# Altium PCB PCB1.PcbDoc
Units mil, origin at the board's own origin, x right, y up, seen from the top; angles counter-clockwise.
Board outline 4640.02 x 1550.03 mil, 2 copper layers (Top Layer, Bottom Layer), stack 65.792 mil thick; 58 components, 43 nets, 194 pads, 4 vias.
Unrouted connection lines stored in the file: 1.
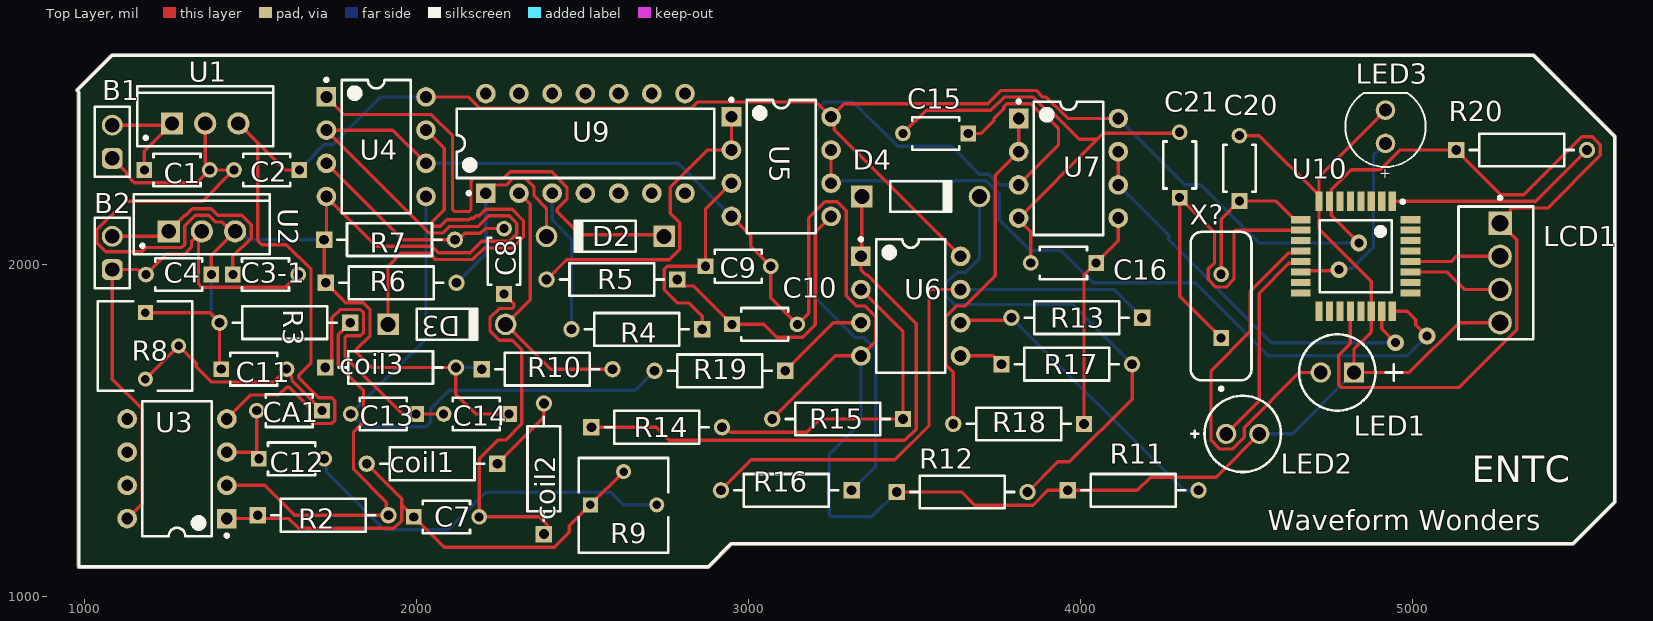
[diagram p0: Top Layer view]
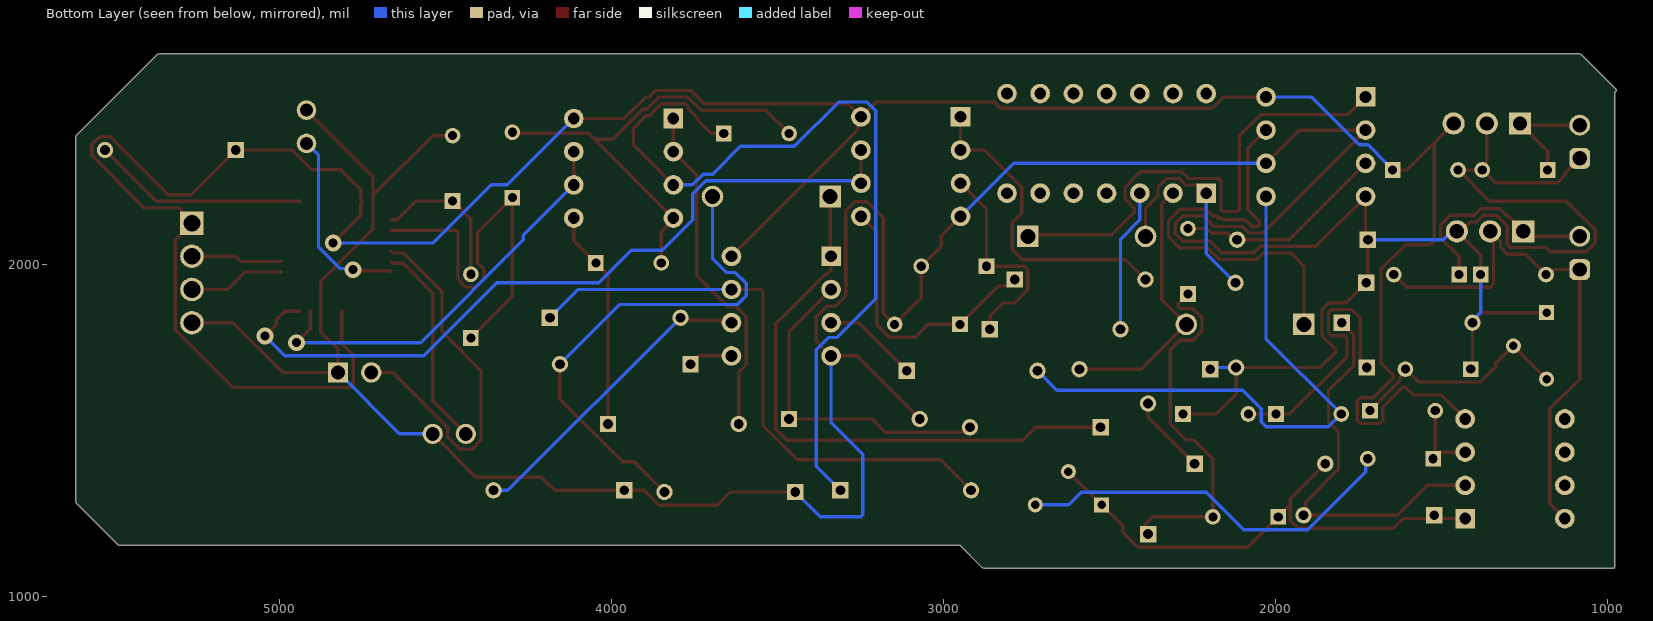
[diagram p1: Bottom Layer view, seen from below]
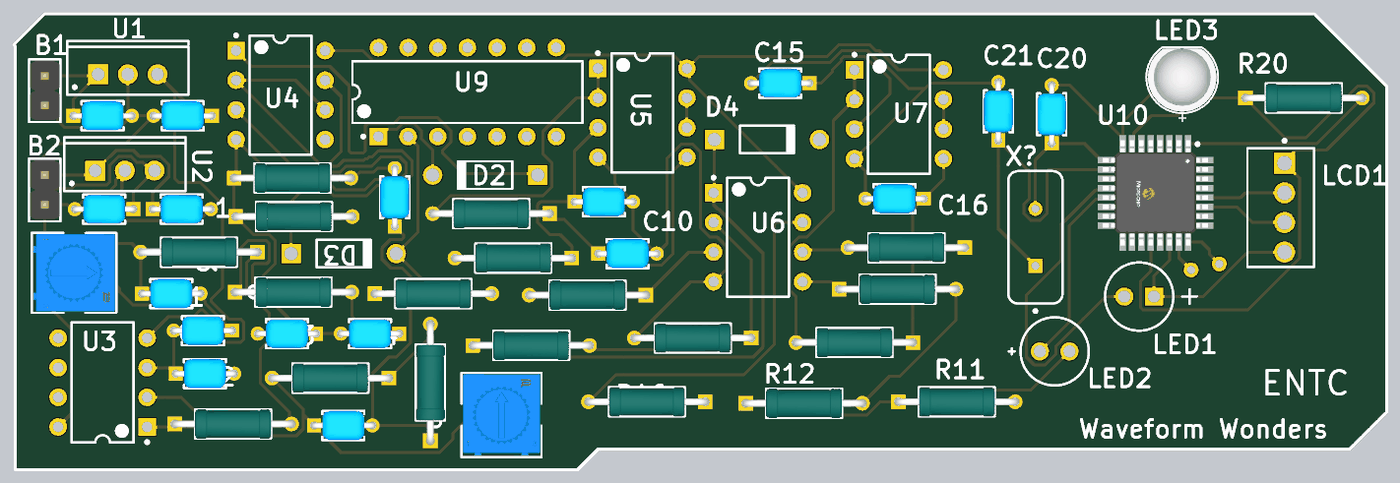
[diagram p2: 3D render of the assembled board from above, using the file's embedded part models]

## Layer stack, top to bottom
Top Solder: solder mask 0.4, Solder Resist, Dk 3.5
Top Layer: signal copper 1.4
Dielectric 1: dielectric 62.9921, FR-4, Dk 4.8
Bottom Layer: signal copper 1.4
Bottom Solder: solder mask 0.4, Solder Resist, Dk 3.5

## Board outline
985,1084.98 cw(c985,1090) 979.99,1090 979.99,2519.99 cw(c980,2525) 976.45,2528.55 1081.45,2633.55 1085,2635.01 5365,2635.01 5368.55,2633.55 5613.55,2388.55 5615.02,2385 5615.02,1285 5613.55,1281.45 5488.55,1156.45 5485,1154.98 2952.08,1154.98 2883.55,1086.45 2880,1084.98

## Design rules (kind name [scope] priority, off if disabled: settings)
Clearance Clearance_1 [OnMid vs OnMid] p1: gap=10 ignorepadtopadclearanceinfootprint=FALSE except(0: Arc-Hole Track-Hole SMDPad-Hole THPad-Hole Via-Hole Fill-Hole Poly-Hole Region-Hole Text-Hole) sourcerule=38 cellrowname=All cellrowtype=0 cellcolname=All cellcoltype=0 innerlayers=TRUE
Clearance Clearance_2 [(ExistsOnLayer('Top Layer') Or ExistsOnLayer('Bottom Layer')) vs (ExistsOnLayer('Top Layer') Or ExistsOnLayer('Bottom Layer'))] p2: gap=10 ignorepadtopadclearanceinfootprint=FALSE except(0: Arc-Hole Track-Hole SMDPad-Hole THPad-Hole Via-Hole Fill-Hole Poly-Hole Region-Hole Text-Hole) sourcerule=38 cellrowname=All cellrowtype=0 cellcolname=All cellcoltype=0 outerlayers=TRUE
Clearance [All] p3: gap=10 ignorepadtopadclearanceinfootprint=FALSE except(0: Arc-Hole Track-Hole SMDPad-Hole THPad-Hole Via-Hole Fill-Hole Poly-Hole Region-Hole Text-Hole)
Clearance [All] p4: gap=10 ignorepadtopadclearanceinfootprint=FALSE except(0: Arc-Hole Track-Hole SMDPad-Hole THPad-Hole Via-Hole Fill-Hole Poly-Hole Region-Hole Text-Hole)
PolygonConnect [All] p1: connectstyle=Relief reliefconductorwidth=10 reliefentries=4 polygonreliefangle="90 Angle" airgapwidth=10
RoutingVias [All] p1: holewidth=28 width=50 viastyle="Through Hole" minholewidth=28 minwidth=50 maxholewidth=28 maxwidth=50
ShortCircuit ShortCircuit_2 [All] p1: allowed=FALSE
ShortCircuit ShortCircuit_1 [All] p2: allowed=FALSE
ShortCircuit [All] p3: allowed=FALSE
SolderMaskExpansion [All] p1: expansion=4 istentingtop=FALSE
Width [All] p1: maxlimit=10 minlimit=10 preferedwidth=10
29 further rules are at their usual default settings.

## Components (designator, comment, footprint, x,y, rotation, side; value= is the part's Value field where it differs from the comment)
B1 "7v" 61300211121 1085,2370 r90 top
B2 "7v" 61300211121 1085,2035 r90 top
C1 "0.33u" FP-RCE0K1-MFG 1280,2285 r0 top
C2 "0.1u" FP-RCE0K1-MFG 1550,2285 r180 top
C3-1 "0.33u" FP-RCE0K1-MFG 1546.57,1970 r0 top
C4 "0.1u" FP-RCE0K1-MFG 1285,1970 r180 top
C7 "0.1u" FP-RCE0K1-MFG 2091.57,1240 r0 top
C8 "22p" FP-RCE0K1-MFG 2265,2010 r90 top
C9 "1u" FP-RCE0K1-MFG 2970,1995 r0 top
C10 "1u" FP-RCE0K1-MFG 3050,1820 r0 top
C11 "0.1u" FP-RCE0K1-MFG 1511.57,1685 r0 top
C12 "0.1u" FP-RCE0K1-MFG 1625,1415 r0 top
C13 "0.1u" FP-RCE0K1-MFG 1901.57,1550 r180 top
C14 "0.1u" FP-RCE0K1-MFG 2181.57,1550 r180 top
C15 "1u" FP-RCE0K1-MFG 3565,2395 r180 top
C16 "1u" FP-RCE0K1-MFG 3950,2005 r180 top
C20 "22p" FP-RCE0K1-MFG 4480,2290 r90 top
C21 "22p" FP-RCE0K1-MFG 4300,2300 r90 top
CA1 "0.1u" FP-RCE0K1-MFG 1618.43,1560 r180 top
coil1 "1k" FP-MRS25-MFG 2048.15,1400 r180 top
coil2 "1k" FP-MRS25-MFG 2385,1385 r90 top
coil3 "1k" FP-MRS25-MFG 1923.15,1690 r0 top
D2 "1N4001" DIOD-DO-41-P-2_V 2570,2085 r180 top
D3 "1N4001" DIOD-DO-41-P-2_V 2092.83,1820 r0 top
D4 "1N4001" DIOD-DO-41-P-2_V 3520,2205 r0 top
LCD1 "640456-4" TECO-640456-4 5265,1975 r90 top
LED1 "Red" AVAG-HLMP-3301-2 4825,1675 r180 top
LED2 "Green" AVAG-HLMP-4740 4490,1490 r0 top
LED3 "151051BS04000" WL-TMRC_D5.9H8.7 4920.01,2414.99 r90 top
R2 "18k" FP-MRS25-MFG 1720,1245 r0 top
R3 "18k" FP-MRS25-MFG 1605,1825 r180 top
R4 "18k" FP-MRS25-MFG 2665,1805 r180 top
R5 "18k" FP-MRS25-MFG 2590,1955 r180 top
R6 "1k" FP-MRS25-MFG 1925,1945 r0 top
R7 "1k" FP-MRS25-MFG 1920,2075 r0 top
R8 "3362P-1-104TLF" FP-3362P-T-MFG 1183.62,1755 r270 top
R9 "3362P-1-104TLF" FP-3362P-T-MFG 2625,1275 r0 top
R10 "1k" FP-MRS25-MFG 2395,1685 r0 top
R11 "1k" FP-MRS25-MFG 4160,1320 r0 top
R12 "2k" FP-MRS25-MFG 3645,1315 r0 top
R13 "1k" FP-MRS25-MFG 3990,1840 r180 top
R14 "2k" FP-MRS25-MFG 2725,1510 r0 top
R15 "2k" FP-MRS25-MFG 3270,1535 r180 top
R16 "2k" FP-MRS25-MFG 3115,1320 r180 top
R17 "1k" FP-MRS25-MFG 3960,1700 r0 top
R18 "2k" FP-MRS25-MFG 3815,1520 r180 top
R19 "1k" FP-MRS25-MFG 2915,1680 r180 top
R20 "10k" FP-MRS25-MFG 5330,2345 r0 top
U1 "7805" TO220 1365,2425 r0 top
U2 "7805" TO220 1355,2100 r0 top
U3 "LM358N" N08E 1280,1385 r180 top
U4 "LM358N" P0008A 1880,2355 r0 top
U5 "LM358N" P0008A 3100,2295 r0 top
U6 "LM358N" P0008A 3490,1875 r0 top
U7 "LM358N" P0008A 3965,2290 r0 top
U9 "XOR" N0014A 2510,2365 r90 top
U10 "ATMEGA328P-AUR" FP-32A-MFG 4830,2025 r270 top
X? "FOXSLF/160-20" FOX-FOXSLF160-20 4425,1875 r90 top

## Footprints (in the part's own frame and the unit in brackets; to place one, negate y for a bottom-side part, rotate by r counter-clockwise, add the part's x,y. Pads: shape width x height; smd on the part's side, far side on the other; paste and mask are expansions set on the pad)
61300211121 [mm] "Pin Header, pitch 2.54 mm, THT, Vertical, single row, 2p"
  rrect50% 1.6x1.6 hole 1.1: 1(-1.27,0)
  round 1.6 hole 1.1: 2(1.27,0)
  silkscreen extent -2.69,-1.34 2.69,1.34, body extent -2.54,-1.27 2.54,1.27, height 8.57
AVAG-HLMP-3301-2 [mm] "THD, 2-Leads, Body Dia 5.85mm"
  rect 1.55x1.55 hole 1.05: 1(0,0)
  round 1.55 hole 1.05: 2(2.54,0)
  silkscreen extent -3.68,-2.92 4.19,2.92
AVAG-HLMP-4740 [mm] "THD, 2-Leads, Dia 5.845mm, Pitch 2.54mm"
  round 1.55 hole 1.05: 1(-1.27,0) 2(1.27,0)
  silkscreen extent -3.92,-2.92 2.92,2.92
DIOD-DO-41-P-2_V [mm] "2-Leads, Axial Lead, Body 4.635x2.36mm, Pin Spacing 9mm"
  rect 1.65x1.65 hole 1.15: 1(-4.5,0)
  round 1.65 hole 1.15: 2(4.5,0)
  silkscreen extent -2.32,-1.18 2.32,1.18, body extent -4.93,-1.18 4.93,1.18, height 2.35
FOX-FOXSLF160-20 [mm] "THD, 2-Leads, Body 11.35x4.65mm"
  rect 1.2x1.2 hole 0.7: 1(-2.44,0)
  round 1.2 hole 0.7: 2(2.44,0)
  silkscreen extent -6.45,-2.33 5.68,2.33, body extent -5.67,-2.32 5.68,2.33, height 3.6
FP-32A-MFG [mm]
  rect 1.5x0.55 smd paste+0 mask+0: 1(-4.2,2.8) 2(-4.2,2) 3(-4.2,1.2) 4(-4.2,0.4) 5(-4.2,-0.4) 6(-4.2,-1.2) 7(-4.2,-2) 8(-4.2,-2.8) 17(4.2,-2.8) 18(4.2,-2) 19(4.2,-1.2) 20(4.2,-0.4) 21(4.2,0.4) 22(4.2,1.2) 23(4.2,2) 24(4.2,2.8)
  rect 0.55x1.5 smd paste+0 mask+0: 9(-2.8,-4.2) 10(-2,-4.2) 11(-1.2,-4.2) 12(-0.4,-4.2) 13(0.4,-4.2) 14(1.2,-4.2) 15(2,-4.2) 16(2.8,-4.2) 25(2.8,4.2) 26(2,4.2) 27(1.2,4.2) 28(0.4,4.2) 29(-0.4,4.2) 30(-1.2,4.2) 31(-2,4.2) 32(-2.8,4.2)
  silkscreen extent -4.3,-2.75 2.75,3.73, body extent -5.05,-5.05 5.05,5.05, height 0.25
FP-3362P-T-MFG [mm]
  rect 1.15x1.15 hole 0.65 paste-2539.97 mask+0: 1(-2.54,0.035)
  round 1.15 hole 0.65 paste-2539.97 mask+0: 2(0,2.575) 3(2.54,0.035)
  silkscreen extent -3.42,-3.62 3.42,3.62, body extent -3.52,-3.72 3.52,3.72, height 0.25
FP-MRS25-MFG [mm]
  rect 1.25x1.25 hole 0.75 paste-2539.97 mask+0: 1(-5,0)
  round 1.25 hole 0.75 paste-2539.97 mask+0: 2(5,0)
  silkscreen extent -3.98,-1.25 3.98,1.25, body extent -5.72,-1.35 5.72,1.35, height 0.25
FP-RCE0K1-MFG [mm]
  rect 1.2x1.2 hole 0.7 paste-2539.97 mask+0: 1(-2.5,0)
  round 1.2 hole 0.7 paste-2539.97 mask+0: 2(2.5,0)
  silkscreen extent -1.8,-1.25 1.8,1.25, body extent -3.2,-1.35 3.2,1.35, height 0.25
N08E [mm] "DIP, 8-Pin, Row Spacing 7.62 mm, Pitch 2.54 mm"
  rect 1.5x1.5 hole 0.9: 1(-3.81,3.81)
  round 1.5 hole 0.9: 2(-3.81,1.27) 3(-3.81,-1.27) 4(-3.81,-3.81) 5(3.81,-3.81) 6(3.81,-1.27) 7(3.81,1.27) 8(3.81,3.81)
  silkscreen extent -3.94,-5.15 2.65,5.23, body extent -3.6,-5.15 3.6,5.15, height 5.33
N0014A [mm] "DIP, 14-Leads, Body 19.7x6.6mm, Pitch 2.54mm"
  rect 1.5x1.5 hole 0.9: 1(-3.81,7.62)
  round 1.5 hole 0.9: 2(-3.81,5.08) 3(-3.81,2.54) 4(-3.81,0) 5(-3.81,-2.54) 6(-3.81,-5.08) 7(-3.81,-7.62) 8(3.81,-7.62) 9(3.81,-5.08) 10(3.81,-2.54) 11(3.81,0) 12(3.81,2.54) 13(3.81,5.08) 14(3.81,7.62)
  silkscreen extent -3.93,-9.85 2.65,9.85, body extent -3.95,-9.85 3.95,9.85, height 5.08
P0008A [mm] "DIP, 8-Leads, Body 10.15x6.6mm, Pitch 2.54mm"
  rect 1.5x1.5 hole 0.9: 1(-3.81,3.81)
  round 1.5 hole 0.9: 2(-3.81,1.27) 3(-3.81,-1.27) 4(-3.81,-3.81) 5(3.81,-3.81) 6(3.81,-1.27) 7(3.81,1.27) 8(3.81,3.81)
  silkscreen extent -3.93,-5.1 2.65,5.23, body extent -3.95,-5.07 3.95,5.07, height 5.08
TECO-640456-4 [mm] "Through Hole, 4-Leads, Body 10.16x5.72mm, Pitch 2.54mm"
  rect 1.8x1.8 hole 1.27 paste-2539.97: 1(3.81,0)
  round 1.8 hole 1.27 paste-2539.97: 2(1.27,0) 3(-1.27,0) 4(-3.81,0)
  silkscreen extent -5.08,-2.54 5.86,3.18, body extent -5.08,-2.54 5.08,3.18, height 10.03
TO220 [mm] "TO, Thru-Hole, Vertical, Heatsink Mounted; 3 In-Line Leads; Pitch 2.54 mm"
  rect 1.7x1.7 hole 1.1: 1(-2.54,0)
  round 1.7 hole 1.1: 2(0,0) 3(2.54,0)
  silkscreen extent -5.2,-1.75 5.2,2.85, body extent -5.25,-1.8 5.25,2.9, height 19.7
WL-TMRC_D5.9H8.7 [mm] "THT Mono-color Round Color LED, 2-leads"
  round 1.5 hole 1: 1(-1.27,0) 2(1.27,0)
  silkscreen extent -3.07,-3.07 2.58,3.08, body extent -2.95,-2.95 2.45,2.95, height 9.2

## Part data
B1 B2: library part CMP-1712-00002-5, Color=Black, Contact Resistance=20mΩ, Current Rating=3A, Max Operating Temperature=125°C, Min Operating Temperature=-40°C, Operating Supply Voltage=250V, Connector Type="Male Pin", Contact Gender=Male, Contact Material=Copper, Contact Mating Length=5.9944mm, Contact Plating=Gold, Gender=Male, Height=8.94mm, Housing Material=PBT, Lead Free="Lead Free", Lead Pitch=2.54mm, Mount="Through Hole", NexarPartId=20081794, Number of Contacts=2, Number of Pins=2, Number of Positions=2, Number of Rows=1, Orientation=Vertical, Packaging=Bulk, Pitch=2.54mm, REACH SVHC="No SVHC", RoHS=Compliant, Termination="Through Hole", Voltage Rating=250V
C1 C2 C3-1 C4 C7 C8 C9 C10 C11 C12 C13 C14 C15 C16 C20 C21 CA1: library part CMP-06035-031280-1, "Cap Ceramic 100nF 50V X7R ±10% Radial 5mm +125°C Automotive Bulk", Capacitance=100nF, Case/Package=Radial, Dielectric=X7R, Max Operating Temperature=125°C, Min Operating Temperature=-55°C, Package Quantity=2000, Ratings=AEC-Q200, Resistor Type=Ceramic, Tolerance=10%, Voltage Rating=50V, Height=3.5mm, Height - Seated (Max)=0.138inch, Lead Diameter=0.5mm, Lead Free="Lead Free", Lead Pitch=0.197inch, Lead/Base Style="Formed Leads", Length=0.142inch, Mount="Through Hole", Packaging="Tape and Reel", Termination=Radial, Voltage Rating (DC)=50V, Width=0.098inch
coil1 coil2 coil3 R2 R3 R4 R5 R6 R7 R10 R11 R12 R13 R14 R15 R16 R17 R18 R19 R20: library part CMP-00030-42757237-1, "MRS25000C1000FRP00 Resistor, 100 Ohm, ± 1%, 600 mW, Axial Leaded, Metal Film (Thin Film), Professional", Case/Package=Axial, Max Operating Temperature=155°C, Max Power Dissipation=600mW, Min Operating Temperature=-55°C, Resistance=100Ω, Temperature Coefficient=50ppm/°C, Tolerance=1%, Voltage Rating=350V, Composition="Metal Film, Thin Film", Contact Plating=Tin, Diameter=2.5mm, Lead Diameter=600µm, Lead Free="Lead Free", Length=6.5mm, Military Standard=Not, Mount="Through Hole", NexarPartId=42757237, Number of Pins=2, Number of Terminations=2, Packaging="Tape & Reel (TR)", Power Rating=600mW, Radiation Hardening=No, REACH SVHC=Unknown, RoHS=Compliant, Schedule B="8533210090, 8533210090", Termination=Axial, Voltage Rating (DC)=350V, Width=2.5mm
D2 D3 D4: library part CMP-0639-00006-2, "1.0 A Rectifier, 15 pF, 50 V, -65 to 150 degC, 2-Pin DO-41 Plastic, RoHS, Tape and Reel", Manufacturer="Diodes Inc", Max. Average Rectified Current IO (A)=1, Operating Temperature Range (degC)="-65 to 150", PartNumber=1N4001-T, ComponentLink1Description="Manufacturer URL", ComponentLink1URL=http://diodes.com/, ComponentLink2Description=Datasheet, ComponentLink2URL=http://diodes.com/datasheets/ds28002.pdf, CT (pF)=15, DatasheetVersion="Rev. 8-2", Max. IFSM (A)=30, Max. IR (uA)=5, Mounting Technology="Through Hole", PackageDescription="2-Pin Axial Lead, Body 4.635 x 2.36 mm, Lead Spread 25.4 mm", PackageReference=DO-41-P-2, Packing="Tape and Reel", RoHS=TRUE, VF (V)=1, VRRM (V)=50
LCD1: library part CMP-2000-05419-1, "Male Header, Pitch 2.54 mm, 1 x 4 Position, Height 10.03 mm, Tail Length 3.56 mm, RoHS, Bulk", Color=White, Current, Rating="5 /  / A", Flammability Rating=UL94V-0, Manufacturer="TE Connectivity", Temperature, Operating="-55to+105 /  / degC", Voltage, Rating="250 /  / V", Agency Approvals=CSA,UL, Angle=Straight, Brand/Series=MTA-100Series, Color, Housing=White, Connector Type=MTA-100, Contact Centerline Spacing="0.100 /  / in.", Contact Mating Area Plating=Tin, Contact Plating=Tin, Contact Shape=Square, Contact Termination Area Plating=Tin, Datasheet URL=https://datasheet.ciiva.com/16286/eng-ds-82056-mta-0608-16286228.pdf, Datasheet Version=Dec-14, Length, Overall="0.4 /  / \"", Length, Pin="0.14 /  / \"", Length, Terminal Post="0.14 /  / in.", Manufacturer URL=http://www.te.com/, Material, Contact=CopperAlloy, Material, Housing=Polyester, Mount Angle=Vertical, Mounting Hole Size="0.04 /  / \"", Mounting Type=PCMount, Number of Contacts=4, Number of Positions=4, Number of Rows=1, Pin Spacing="0.1 /  / \"", Primary Type=InterconnectSystem, Size, Post="0.025 /  / in.", Special Features=Pinstrip, Standards=RoHSCompliant,ELVCompliant,UL94V-0, Termination=Solder, Type=PCBPlug
LED1: library part CMP-2000-06411-1, "T-1 3/4 (5 mm) Diffused LED Lamp, 1.9 V, -40 to 100 degC, 2-Pin THD, RoHS, Bulk", Forward Current=25mA, Forward Voltage=2.4V, Manufacturer=Avago, Operating Temp Range=-40Cto100C, Operating Temperature Classification=Industrial, Package Description="2-Pin Through Hole LED, Dia 5.85 mm", Package Reference=HLMP-3301, Package Type=T-13/4, Power Dissipation=85W, Reverse Voltage=5V, Test Current (It)=10mA, Chip Material=GaP, Datasheet URL=http://www.avagotech.com/docs/AV02-1558EN, Datasheet Version=03/2015, DELETED=Compliant, Dominant Wave Length=626nm, Emitting Color=Red, High Brightness=No, Lens Dimensions=5.08x5.08x8.3mm, Lens Type=ColoredDiffused, Lum Intensity=5.4mcd, Luminous Intensity=5.4mcd, Main Category=StandardLED, Manufacturer URL=http://www.avagotech.com/, Mounting=ThroughHole, Mounting Technology=ThroughHole, Number of  Elements=1, Packaging=TapeandReel, Peak Wavelength=635nm, Pin Count=2, Product Depth (mm)=6.1mm, Product Height (mm)=9.19mm, Product Length (mm)=6.1mm, Rad Hardened=No, Shape Type=Circular, Type=Uni-Color, Viewing Angle=60deg
LED2: library part CMP-2000-06413-1, "T-1 3/4 (5 mm) Low Current LED Lamp, Green, 1.9 V, -20 to 100 degC, 2-Pin THD, RoHS, Bulk", Dominant Wavelength/Color Temperature=569nm, Manufacturer=AvagoTechnologies, Package=2T-13/4, Package Description="2-Pin Through Hole Device, Dia 5.845 mm, Pitch 2.54 mm", Package Reference=HLMP-4740, Category=LEDs, Color=Green, Datasheet URL=http://docs.avagotech.com/docs/AV02-1557EN, Datasheet Version=07/2014, Intensity=2.3mcd, Lens Appearance=ColoredDiffused, Lens Shape Type=Circular, Manufacturer URL=http://www.avagotech.com/, Mounting=ThroughHole, Mounting Orientation=TopMount, Mounting Technology=ThroughHole, Number of LEDs=1, Packaging=Bulk, Peak Wavelength=565nm, Pin Count=2, Rad Hard=No, Type=Uni-Color, Viewing Angle=50°
LED3: library part CMP-1488-00009-2, Case/Package=Radial, Color=Blue, Forward Current=100mA, Forward Voltage=3.2V, Max Operating Temperature=85°C, Max Reverse Voltage (DC)=5V, Min Operating Temperature=-40°C, Test Current=20mA, Dominant Wavelength=470nm, Height=8.6mm, Length=5mm, Lens Size=5mm, Lens Style="Circular, Diffused, Round", Luminous Intensity=500mcd, Mount="Through Hole", NexarPartId=29717812, Packaging=Bulk, Peak Wavelength=465nm, REACH SVHC=Unknown, RoHS=Compliant, Viewing Angle=40°, Wavelength=470nm, Width=5mm
R8 R9: library part CMP-07234-000031-1, "TRIMMER 100K OHM 0.5W PC PIN TOP", Max Operating Temperature=125°C, Max Power Dissipation=500mW, Min Operating Temperature=-55°C, Package Quantity=50, Resistance=100kR, Resistor Type=Cermet, Temperature Coefficient=100ppm/°C, Tolerance=10%, Height=0.185inch, Length=0.275inch, Mount="Through Hole", Packaging=Rail/Tube, Power Rating=500mW, RoHS Compliant=Yes, Series="Trimpot® 3362 - Sealed", Technology=CERMET, Termination="PC Pin", Width=0.26inch
U1 U2: library part CMP-0244-00483-1, "Positive Voltage Regulator, 5V, 3-Pin TO-220", ComponentLink1Description="Manufacturer URL", ComponentLink1URL=http://www.st.com, ComponentLink2Description=Datasheet, ComponentLink2URL=http://www.st.com/internet/com/TECHNICAL_RESOURCES/TECHNICAL_LITERATURE/DATASHEET/CD00000444.pdf, ComponentLink3Description="Package Specification", ComponentLink3URL=http://www.st.com/internet/com/TECHNICAL_RESOURCES/TECHNICAL_LITERATURE/PACKAGE_INFORMATION/CD00004649.pdf, DatasheetVersion=16/11/2011, PackageDescription="TO, Thru-Hole, Vertical, Heatsink Mounted; 3 In-Line Leads; Pitch 2.54 mm", PackageReference=TO220, PackageVersion=ver3.0
U3: library part CMP-0055-00154-2, "Low Power Dual Operational Amplifier, 8-pin MDIP", Manufacturer="National Semiconductor", PackageTopMarking=NSUZXYTTE#*LM*358N, PowerWise=N, Code_JEDEC=MS-001-BA, ComponentLink1Description="LM358 Datasheet", ComponentLink1URL=http://www.national.com/ds/LM/LM358.pdf, ComponentLink2Description="LM358 Web Page", ComponentLink2URL=http://www.national.com/pf/LM/LM358.html, ComponentLink3Description="N08E Package Page", ComponentLink3URL=http://www.national.com/packaging/folders/n08e.html, CompType=Amplifiers, DatasheetVersion=Oct-2005, PackageDescription="MDIP, .365 x .250 x .130in, 8 Lead, .100in Pitch", PackageReference=N08E, PackageVersion="revG, May-2006", PinCount=8, RevisionNote="Component URLs added", RoHS=N
U4 U5 U6 U7: library part CMP-0055-00153-3, "Low Power Dual Operational Amplifier, 8-pin MDIP, Pb-Free", Manufacturer="Texas Instruments", Package Reference=P0008A, PackageTopMarking=NSUZXYTTE#*LM*358N, PowerWise=N, Code_JEDEC=MS-001-BA, ComponentLink1Description="Datasheet URL", ComponentLink1URL=http://www.ti.com/general/docs/lit/getliterature.tsp?genericPartNumber=LM358-N&fileType=pdf, CompType=Amplifiers, PackageDescription="MDIP, .365 x .250 x .130in, 8 Lead, .100in Pitch", PinCount=8, RoHS=Y
U9: library part CMP-0778-00110-3, "CMOS Quad Exclusive-OR Gate, N0014A, TUBE", F @ Nom Voltage(Max)(Mhz)=8, Generic Part Number=CD4030B, ICC @ Nom Voltage(Max)(mA)=0.015, Manufacturer="Texas Instruments", Operating Temperature Range(C)="-55 to 125", Rating=Military, tpd @ Nom Voltage(Max)(ns)=130, Voltage(Nom)(V)=10, Bits(#)=4, DatasheetVersion=SCHS035C, Input Type=CMOS, Output Drive (IOL/IOH)(Max)(mA)=1.5/-1.5, Output Type=CMOS, PackageReference=N0014A, Schmitt Trigger=No, Technology Family=CD4000, VCC(Max)(V)=18, VCC(Min)(V)=3
U10: library part CMP-06276-000046-1, "IC MCU 8BIT 32KB FLASH 32TQFP", Case/Package=TQFP, Frequency=40MHz, Max Operating Temperature=85°C, Min Operating Temperature=-40°C, Core Architecture=PIC, Interface=I2C, Memory Size=32KB, Memory Type=FLASH, Number of I/Os=32, Oscillator Type=Internal, Packaging="Cut Tape", Peripherals="Brown-out Detect/Reset"
X?: library part CMP-1749-00003-1, "Resistance Weld Thru-Hole Crystal, 16 MHz, -20 to 70 degC, 2-Pin THD, RoHS, Bulk", Case\Package=Axial, Max Operating Temperature="155 degC", Min Operating Temperature="-55 degC", Package Quantity=200, Power Rating="250 mW", Resistance="221 kohm", Tolerance=1%, Voltage Rating="250 V", ComponentLink1Description="Manufacturer URL", ComponentLink1URL=http://www.foxonline.com/, ComponentLink2Description=Datasheet, ComponentLink2URL=http://www.foxonline.com/pdfs/hc49slf.pdf, DatasheetVersion=Mar-15, Length="0.248 inch", Mount="Through Hole", PackageDescription="2-Pin Through Hole Device, Body 11.35 x 4.65 mm", PackageReference=FOXSLF160-20, Packaging=Bulk, RoHSCompliant=true

## Via types
v1: diameter 50, hole 28, Top Layer to Bottom Layer, 4 vias

## Nets (pads, with @x,y where several pads share a name; then routed paths per layer and width w, separated by ;. In a path a pad name is that pad's centre, name@x,y a point inside that pad or via, vN(x,y) a via of type N, cw(c..) or ccw(c..) an arc to the next point about the centre after c; other vN are vias at no path point)
-Vcc: B2.1 C3-1.2 C4.2 U2.2 U3.8 | length 1615.1
  Top Layer w10: U3.8 1175,1280 1175,1565 1085,1655 B2.1 1161.5,1985 1176.5,1970 C4.2 1248.11,2031.54 1302.96,2031.54 1323.46,2052.04 1323.46,2068.46 U2.2@1344.8,2089.8 ; U2.2 U2.2@1344.8,2089.8 ; C3-1.2 1606.38,1931.38 1353.59,1931.38 1344.8,1940.16 U2.2@1344.8,2089.8
AmplitudeOut: U7.6 U7.7 U10.23 | length 1251.4
  Top Layer w10: U7.6 U7.7 ; U10.23 4908.74,1806.26 v1(4950,1765)
  Bottom Layer w10: U7.6 4266.69,2088.31 4266.69,2074.75 4576.44,1765 v1(4950,1765)
GND: B1.1 C1.2 C2.2 C4.1 C9.2 C10.2 C11.1 C14.1 C15.2 C16.2 C20.2 C21.2 coil3.2 LCD1.4 LED1.1 LED2.2 LED3.2 R3.2 R6.1 R7.1 R8.1 R10.1 R11.1 R12.1 R15.2 U1.2 U2.3 U4.2 U4.4 U4.6 U5.4 U6.4 U7.4 U10.8 U10.22 | length 13857.7
  Top Layer w10: B1.1 1128.3,2276.7 1128.3,2269.82 1151.74,2246.38 1339.8,2246.38 C1.2 ; R8.1 1378.15,1855 R3.2 1408.15,1690 C11.1 ; U1.2 1365,2308.5 1378.43,2295.08 C1.2 ; C4.1 1383.43,2028.43 U2.3 1443.39,2100 1414.93,2128.46 1395.07,2128.46 1375.07,2148.46 1334.93,2148.46 1303.46,2117 1303.46,2060.32 1294.68,2051.54 1186.72,2051.54 1173.69,2038.5 1065.74,2038.5 1038.5,2065.74 1038.5,2104.26 1125.31,2191.07 1357.64,2191.07 C2.2 C1.2 ; U4.6 1930,2405 U4.2 2040,2095 2080.84,2095 2100.44,2114.61 2185.8,2114.61 2218.24,2147.05 2281,2147.05 2303.62,2124.42 2303.62,2092.43 2281,2069.8 2197.57,2069.8 2163.16,2035.39 2066.36,2035.39 2046.75,2055 1880,2055 U4.4 1730,2081.85 R7.1 1723.15,1950 1788.54,1884.61 1840.95,1884.61 1861.46,1864.1 1861.46,1785.9 1820.13,1744.57 1820.13,1736.29 1866.42,1690 coil3.2 2120,1610 2180,1550 C14.1 ; U5.4 3007.82,2087.18 3007.82,2055.6 C9.2 3068.43,1900 C10.2 3182.52,1854.09 3182.52,2140.49 3231.56,2189.53 3268.44,2189.53 3295.47,2162.5 3295.47,1906.56 3327.03,1875 3352.97,1875 3384.53,1843.44 3384.53,1769.53 U6.4 3263.15,1725 R15.2 ; R12.1 3643.2,1315 3682.81,1275.39 3858.26,1275.39 3902.86,1320 R11.1 4172.7,1320 4212.31,1359.61 4409.61,1359.61 LED2.2 ; C15.2 3536.1,2464.53 3730.97,2464.53 3770.97,2504.53 3859.03,2504.53 3895.7,2467.86 3906.61,2467.86 3996.97,2377.5 4052.5,2377.5 ; C16.2 3851.57,2099.35 3815,2135.92 U7.4 4052.5,2377.5 ; C21.2@4305,2393.43 C21.2 4297.05,2395.47 4070.47,2395.47 4052.5,2377.5 ; C20.2@4475,2393.43 C20.2 4540.39,2388.43 U10.8@4719.76,2209.05 ; LED3.2 4719.76,2264.76 U10.8@4719.76,2209.05 ; LCD1.4 5141.57,1825 4991.57,1675 LED1.1 4825,1744.53 4877.24,1796.77 U10.22 4877.24,1949.09 4719.76,2106.57 U10.8 U10.8@4719.76,2209.05
  Bottom Layer w10: C4.1 1383.43,1856.29 1408.15,1831.56 R3.2 ; U2.3 1470.4,2100 1495.4,2075 R7.1 ; U4.6 2790,2305 U5.4 ; coil3.2 2193.15,1690 R10.1 ; U6.4 3340,1523.36 3245,1428.36 3245,1245.86 3250.86,1240 3373.15,1240 R12.1 ; LED2.2 4640,1490 LED1.1
NetB1_2: B1.2 C1.1 U1.1 | length 349.6
  Top Layer w10: B1.2 U1.1@1260,2420 ; C1.1 1181.58,2341.58 U1.1@1260,2420 ; U1.1 U1.1@1260,2420
NetB2_2: B2.2 C3-1.1 U2.1 | length 646.1
  Top Layer w10: B2.2 1240,2085 U2.1 1303.46,2148.46 1306.64,2148.46 1326.64,2168.46 1383.36,2168.46 1403.36,2148.46 1475.07,2148.46 1503.46,2120.07 1503.46,2079.93 1448.15,2024.61 C3-1.1
NetC7_2: C7.2 C8.1 coil2.1 | length 1081.3
  Top Layer w10: C8.1 2294.95,1881.62 2294.95,1873.34 2289.09,1867.48 2250.33,1867.48 2222.52,1839.67 2222.52,1800.33 2251.14,1771.71 2290,1771.71 2318.62,1743.09 2318.62,1520.16 2269.82,1471.36 2245.93,1471.36 2190,1415.43 C7.2 2371.3,1240 2395,1216.3
NetC8_2: C8.2 R7.2 U4.3 | length 644.1
  Top Layer w10: U4.3 1960,2075 R7.2 2127.46,2075 2147.07,2094.61 2194.08,2094.61 2207.9,2108.43 C8.2
NetC9_1: C9.1 R4.1 U5.3 | length 659.4
  Top Layer w10: R4.1 2861.85,1844.61 2822.06,1884.39 2787.03,1884.39 2747.24,1924.18 2747.24,1985.82 2756.42,1995 C9.1 2871.57,2166.57 U5.3
NetC10_1: C10.1 R5.1 U5.5 | length 848.6
  Top Layer w10: R5.1 2806.46,1935.39 2836.18,1935.39 C10.1 3048,1820 3086.62,1781.38 3164.42,1781.38 3202.52,1819.47 3202.52,2097.52 U5.5
NetC11_2: C11.2 CA1.1 R8.2 R8.3 | length 702.7
  Top Layer w10: R8.3 R8.2 1337.53,1702.47 1337.53,1692.16 1383.31,1646.38 1571.38,1646.38 C11.2 1610,1674.92 1626.52,1658.4 1626.52,1650.33 CA1.1
NetC12_1: C12.1 CA1.2 U3.3 | length 224.3
  Top Layer w10: U3.3 C12.1@1506.57,1435 ; CA1.2 1520,1421.57 C12.1
NetC12_2: C12.2 R9.3 | length 1171.4
  Bottom Layer w10: C12.2 1729.46,1408.97 1729.46,1376.38 1904.46,1201.38 2096.76,1201.38 2209.4,1314.02 2586.98,1314.02 2624.62,1276.38 R9.3
NetC13_1: C13.1 C14.2 coil3.1 | length 818.5
  Top Layer w10: coil3.1 1742.11,1705.81 1745.91,1705.81 1745.91,1839.48 1771.03,1864.61 1832.67,1864.61 1841.46,1855.82 1841.46,1794.18 1832.67,1785.39 1791.76,1785.39 1785.91,1779.54 1785.91,1722.38 1958.28,1550 C14.2
NetC15_1: C15.1 R16.1 U7.3 | length 2553.7
  Top Layer w10: C15.1 3702.05,2395 3740.65,2433.61 3740.65,2439.76 3770.47,2469.58 3770.47,2475.74 3779.26,2484.53 3850.74,2484.53 3887.41,2447.86 3898.33,2447.86 3935,2411.19 3935,2360 U7.3
  Bottom Layer w10: R16.1 3384.53,1392.68 3384.53,1743.44 3347.5,1780.47 3321.56,1780.47 3205.47,1896.56 3205.47,2463.44 3231.56,2489.53 3317.43,2489.53 3450.58,2356.38 3612.94,2356.38 3696.83,2272.48 3725.12,2272.48 3757.6,2240 U7.3
NetC16_1: C16.1 R18.1 U7.5 | length 662.7
  Top Layer w10: R18.1 4011.85,1968.42 C16.1 4115,2071.57 U7.5
NetC20_1: C20.1 U10.9 X?.2 | length 451.3
  Top Layer w10: X?.2 4425,2136.57 C20.1 4589.61,2191.57 4645.95,2135.24 U10.9
NetC21_1: C21.1 U10.10 X?.1 | length 1215.1
  Top Layer w10: X?.1 4300,1903.94 C21.1 4397.83,2103.74 4399.14,2103.74 4405,2097.88 4405,2005.68 4386.38,1987.06 4386.38,1955.07 4409,1932.44 4441,1932.44 4463.62,1955.07 4463.62,2097.88 4469.48,2103.74 U10.10
Netcoil1_1: coil1.1 coil2.2 | length 239.8
  Top Layer w10: coil1.1 2385,1540 coil2.2
NetD2_1: D2.1 U4.1 | length 1554.3
  Top Layer w10: U4.1 1783.04,2451.96 2046.01,2451.96 2110,2387.97 2110,2165.86 2115.86,2160 2159.61,2160 2165.47,2165.86 2165.47,2250.74 2174.26,2259.53 2263.27,2259.53 2283.27,2279.53 2408.44,2279.53 2454.53,2233.44 2454.53,2196.56 2425.63,2167.66 2425.63,2159.37 2495,2090 2742.17,2090 D2.1
NetD2_2: D2.2 R6.2 U9.1 | length 644.6
  Top Layer w10: U9.1 2234.53,2239.53 2271.56,2239.53 2291.56,2259.53 2328.44,2259.53 2355.38,2232.59 2355.38,2206.65 2392.83,2169.19 D2.2
  Bottom Layer w10: R6.2 2210,2033.15 U9.1
NetD3_1: D3.1 U4.7 | length 1319.5
  Top Layer w10: D3.1 1915.67,1995.67 1955,2035 2038.47,2035 2058.07,2015.39 2171.44,2015.39 2205.85,2049.8 2289.28,2049.8 2323.62,2084.14 2323.62,2132.71 2289.28,2167.05 2209.96,2167.05 2189.96,2147.05 2180.33,2147.05 2173.28,2140 2165.05,2140 2159.66,2134.61 2092.16,2134.61 2072.55,2115 2055,2115 2049.14,2120.86 2049.14,2129.14 2085,2165 2085,2350 U4.7
NetD3_2: D3.2 R10.2 U9.2 | length 817.2
  Top Layer w10: U9.2 2343.62,2181.38 2343.62,1893.62 D3.2 2405,1685 R10.2
NetD4_1: D4.1 R14.1 U6.1 | length 1781.7
  Top Layer w10: R14.1 2723.2,1510 2762.81,1470.39 3472.67,1470.39 3506.46,1504.18 3506.46,1821.52 3358.44,1969.53 3355,1969.53 3340,1984.53 U6.1 3342.83,2027.83 D4.1
NetD4_2: D4.2 R12.2 R17.2 | length 1538.9
  Top Layer w10: R12.2 3932.69,1405.84 3968.12,1405.84 4156.85,1594.57 R17.2
  Bottom Layer w10: D4.2 3697.17,2019.19 3654.03,1976.06 3628.09,1976.06 3595.47,1943.44 3595.47,1906.56 3622.42,1879.61 3977.24,1879.61 R17.2
NetLCD1_2: LCD1.2 U10.28 | length 276.2
  Top Layer w10: U10.28 5117.67,2009.25 5133.42,2025 LCD1.2
NetLCD1_3: LCD1.3 U10.27 | length 291.5
  Top Layer w10: U10.27 5104.99,1977.76 5157.75,1925 LCD1.3
NetLED1_2: LED1.2 U10.12 | length 1153
  Top Layer w10: U10.12 4658.98,2035.08 4628.91,2035.08 4511.7,1917.87 4511.7,1797.18 4394.49,1679.97 4394.49,1471.15 4421.15,1444.49 4458.85,1444.49 4494.49,1480.12 4494.49,1508.85 4660.64,1675 LED1.2
NetLED2_1: LED2.1 U10.13 | length 629.9
  Top Layer w10: LED2.1 4539.33,1589.33 4539.33,1914.01 4628.91,2003.58 4658.98,2003.58 U10.13
NetLED3_1: LED3.1 U10.14 | length 577.8
  Top Layer w10: U10.14 4668.27,1981.38 4776.38,1981.38 v1(4780,1985)
  Bottom Layer w10: v1(4780,1985) 4783.43,1988.43 4820,1988.43 4883.59,2052.02 4883.59,2328.59 LED3.1
NetR2_2: R2.2 R3.1 U3.2 | length 1206.5
  Top Layer w10: U3.2 1545,1335 1635,1245 R2.2 1910.68,1251.17 1910.68,1284.61 1811.69,1383.59 1811.69,1495.87 1841.77,1525.95 1841.77,1619.57 1765.91,1695.44 1765.91,1789.06 R3.1
NetR4_2: R4.2 U9.3 | length 434.1
  Bottom Layer w10: U9.3 2410,2134.98 2468.15,2076.83 R4.2
NetR5_2: R5.2 U5.1 U5.2 | length 969.3
  Top Layer w10: R5.2 2453.15,2015 2763.34,2015 2794.65,2046.31 2794.65,2125.29 2765.47,2154.46 2765.47,2233.44 2877.03,2345 U5.2 U5.1
NetR11_2: R11.2 R13.2 U6.6 | length 938.5
  Top Layer w10: U6.6 3647.5,1832.5 3785.65,1832.5 R13.2
  Bottom Layer w10: R13.2 4313.15,1320 R11.2
NetR13_1: R13.1 R16.2 U6.7 | length 1791.6
  Top Layer w10: R16.2 3009.85,1411.7 3442.26,1411.7 3545,1514.44 3545,1919.14 3550.86,1925 U6.7
  Bottom Layer w10: U6.7 4101.85,1925 R13.1
NetR14_2: R14.2 R15.1 U6.2 | length 1010
  Top Layer w10: R14.2 2932.46,1510 2947.07,1495.39 3177.35,1495.39 3216.96,1535 R15.1 3466.85,1798.15 U6.2
NetR17_1: R17.1 U6.5 | length 133.5
  Top Layer w10: U6.5 3738.15,1725 R17.1
NetR18_2: R18.2 U7.1 U7.2 | length 1035.5
  Top Layer w10: R18.2 3618.15,1675.69 3595.47,1698.37 3595.47,1843.44 3627.03,1875 3652.97,1875 3744.65,1966.67 3744.65,2269.65 U7.2 U7.1
NetR19_1: R19.1 U6.3 | length 288.2
  Top Layer w10: R19.1 3256.85,1825 U6.3
NetR20_2: R20.2 U10.1 | length 650.7
  Top Layer w10: U10.1 5372.2,2190.35 R20.2
PhaseOut: U5.6 U5.7 U10.24 | length 2338.3
  Top Layer w10: U5.6@3245,2240 U5.6 U5.7 ; U10.24 4985.35,1859.65 5011.35,1833.65 5011.35,1818.65 v1(5045,1785)
  Bottom Layer w10: U5.6 3257.48,2252.48 3716.83,2252.48 3756.69,2212.62 3756.69,2135.33 3848.41,2043.62 3941.35,2043.62 4039.97,1945 4346.8,1945 4566.8,1725 4985,1725 v1(5045,1785)
Rout: C13.2 R19.2 U4.5 | length 1773.2
  Bottom Layer w10: U4.5 2030,1776.85 C13.2 1841.77,1511.38 2029.84,1511.38 2044.53,1526.07 2044.53,1566 2099.98,1621.46 2659.61,1621.46 R19.2
Tout: C7.1 coil1.2 R2.1 R9.1 R9.2 U3.1 | length 1590.2
  Top Layer w10: U3.1 1616.72,1235 1646.32,1205.39 1933.26,1205.39 1956.46,1228.59 1956.46,1276.69 ; coil1.2 1956.46,1294.84 1956.46,1276.69 ; R9.2 R9.1 2461.59,1212.97 2461.59,1194.31 2415.82,1148.54 2084.6,1148.54 C7.1 1956.46,1276.69
Vcc: C2.1 LCD1.1 R20.1 U1.3 U3.4 U4.8 U5.8 U6.8 U7.8 U10.7 U10.20 | length 8647.8
  Top Layer w10: U3.4 1502.42,1607.42 1587.04,1607.42 1609.95,1630.33 1618.24,1630.33 1678.23,1570.34 1678.23,1530.16 1687.02,1521.38 1746.69,1521.38 1755.47,1530.16 1755.47,1589.84 1746.69,1598.62 1706.51,1598.62 1646.52,1658.62 1646.52,1666.9 1683.62,1704 1683.62,1986 1609.62,2060 1535.86,2060 1523.46,2072.39 1523.46,2366.54 ; U1.3 1523.46,2366.54 ; C2.1 1605,2285 1523.46,2366.54 ; U4.8 2157.03,2505 2191.56,2470.47 2828.44,2470.47 2847.5,2489.53 3205.47,2489.53 U5.8 ; U6.8 3259.39,2405.61 3259.39,2435.61 U5.8 ; U7.8 3962.76,2440 3955,2447.76 3955,2448.28 3898.76,2504.53 3887.31,2504.53 3867.31,2524.53 3762.69,2524.53 3722.69,2484.53 3289.53,2484.53 U5.8 ; U10.20 4814.25,1762.06 4779.49,1727.3 4779.49,1638.28 4788.27,1629.49 5140.81,1629.49 5315.43,1804.11 5315.43,2074.57 LCD1.1 5295.43,2155.43 5295.43,2164.5 5301.29,2170.35 5408.22,2170.35 5566.46,2328.59 5566.46,2361.41 5543.26,2384.61 5510.44,2384.61 5336.19,2210.35 5267.8,2210.35 R20.1 4962.97,2345 4903.52,2285.55 4816.38,2285.55 4756.93,2226.09 4756.93,2196.02 U10.7 4756.93,2184.68 4756.93,2148.07 v1(4840,2065)
  Bottom Layer w10: C2.1 1667.05,2303.62 1667.05,2305.02 1722.5,2360.47 1748.44,2360.47 1892.97,2505 U4.8 ; U7.8 4314.8,2240.2 4362.92,2240.2 4538.12,2065 v1(4840,2065)
pads on no net: U3.5 U3.6 U3.7 U9.4 U9.5 U9.6 U9.7 U9.8 U9.9 U9.10 U9.11 U9.12 U9.13 U9.14 U10.2 U10.3 U10.4 U10.5 U10.6 U10.11 U10.15 U10.16 U10.17 U10.18 U10.19 U10.21 U10.25 U10.26 U10.29 U10.30 U10.31 U10.32

## Silkscreen, mask and mechanical layers (free items; w line width, h text height)
Top Overlay:
  lines w10: 980,2525 1085,2630 5365,2630 5610,2385 5610,1285 5485,1160 2950,1160 2880,1090 985,1090 985,2520
  text "ENTC" at 5180,1345 h80
  text "Waveform Wonders" at 4565,1200 h60

## Text inside footprints (layer, text, board x,y; h text height)
LED3: Top Overlay "+" at 4933,2255.55 h31.5 r90